# Altium PCB PiezoControlBoard.PcbDoc (part 3 of 3)
Units mm, origin at the board's own origin, x right, y up, seen from the top; angles counter-clockwise.
Board outline 90 x 115 mm, 4 copper layers (SIGNAL TOP, GND, PWR, SIGNAL BOT), stack 1.59 mm thick; 145 components, 86 nets, 512 pads, 287 vias.
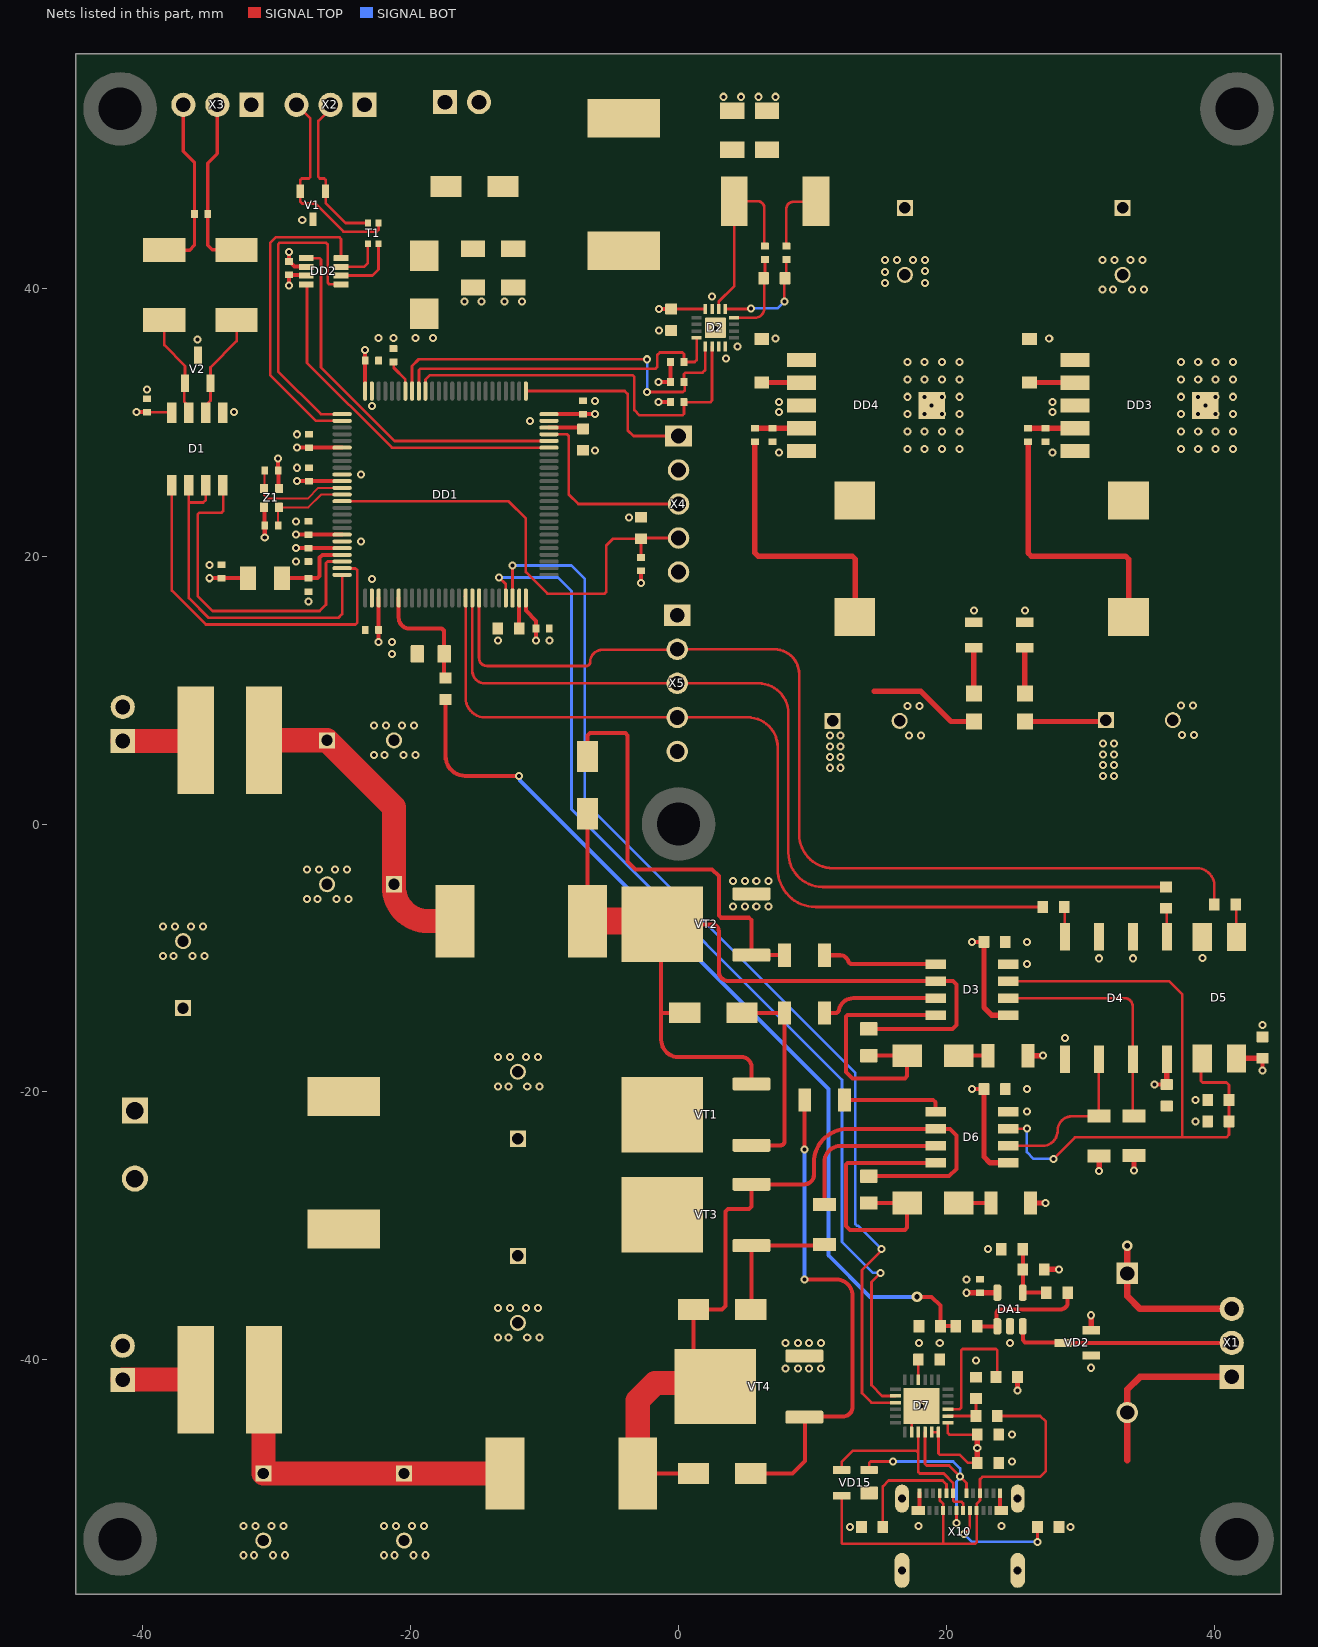
[diagram p4: the nets of this part, all layers, seen from the top]

## Part data (continued)
V1: "TVS DIODE 24VWM 40VC SOT23-3L / ESD Suppressor Diode TVS Bi-Dir 24V Automotive 3-Pin SOT-23 T/R", Manufacturer=STMicroelectronics, Supplier Part Number 1=1027027, Category="TVS Diodes", ComponentLink1Description=https://datasheet.ciiva.com/26935/getdatasheetpartid-779627-26935935.pdf?src-supplier=Verical, ComponentLink1URL=https://datasheet.ciiva.com/26935/getdatasheetpartid-779627-26935935.pdf?src-supplier=Verical, ComponentLink2Description=https://datasheet.ciiva.com/12070/dm00037599-100424-12070821.pdf?src-supplier=Mouser, ComponentLink2URL=https://datasheet.ciiva.com/12070/dm00037599-100424-12070821.pdf?src-supplier=Mouser, ComponentLink3Description=https://datasheet.ciiva.com/23803/dm00037599-23803632.pdf?src-supplier=Newark, ComponentLink3URL=https://datasheet.ciiva.com/23803/dm00037599-23803632.pdf?src-supplier=Newark, ComponentLink4Description=https://datasheet.ciiva.com/22685/1786030-22685811.pdf?src-supplier=Element14, ComponentLink4URL=https://datasheet.ciiva.com/22685/1786030-22685811.pdf?src-supplier=Element14, ComponentLink5Description=https://datasheet.ciiva.com/6574/dm00037599-6574397.pdf?src-supplier=Digikey, ComponentLink5URL=https://datasheet.ciiva.com/6574/dm00037599-6574397.pdf?src-supplier=Digikey, ComponentLink6Description=https://datasheet.ciiva.com/6574/dm00037599-6574398.pdf?src-supplier=Digikey, ComponentLink6URL=https://datasheet.ciiva.com/6574/dm00037599-6574398.pdf?src-supplier=Digikey, ComponentLink7Description=https://datasheet.ciiva.com/41443/001183991-da-01-en-tvs-diode-24-esdcan24-2bly-sot-23-3l-stm-41443402.pdf?src-supplier=Conrad, ComponentLink7URL=https://datasheet.ciiva.com/41443/001183991-da-01-en-tvs-diode-24-esdcan24-2bly-sot-23-3l-stm-41443402.pdf?src-supplier=Conrad, Manufacturer Part Number=ESDCAN24-2BLY, Pricing 1="3000=0,102, 6000=0,0993, 9000=0,064, 12000=0,0968, 15000=0,096, 30000=0,0613, 45000=0,0912, 60000=0,059 (USD)", RoHS=Yes, Stock 1=135000, Supplier 1=https://www.chipdip.ru/product/esdcan24-2bly-umw?from=suggest_product
V2: "SM Series 12 V 400 W Asymmetrical TVS Diode for Extended Common-Mode - SOT-23", Breakdown Voltage=13.3V, Case/Package=SOT-23, Clamping Voltage=26V, Clamping Voltage-Max=12V, Leakage Current=1uA, Manufacturer=Semtech, Max Operating Temperature=125°C, Max Power Dissipation=400W, Max Reverse Leakage Current=20uA, Min Breakdown Voltage=7.5V, Min Operating Temperature=-55°C, Peak Pulse Current=17A, Power Line Protection=No, Supplier Part Number=6910811P, Test Current=1mA, Category="TVS Diodes", ComponentLink1Description=https://datasheet.ciiva.com/16393/sm712-16393584.pdf?src-supplier=Future+Electronics, ComponentLink1URL=https://datasheet.ciiva.com/16393/sm712-16393584.pdf?src-supplier=Future+Electronics, ComponentLink2Description=https://datasheet.ciiva.com/18065/getdatasheetpartid-110620-18065348.pdf?src-supplier=Verical, ComponentLink2URL=https://datasheet.ciiva.com/18065/getdatasheetpartid-110620-18065348.pdf?src-supplier=Verical, ComponentLink3Description=https://datasheet.ciiva.com/5748/579001-5748455.pdf?src-supplier=Farnell, ComponentLink3URL=https://datasheet.ciiva.com/5748/579001-5748455.pdf?src-supplier=Farnell, ComponentLink4Description=https://datasheet.ciiva.com/8029/579001-8029931.pdf?src-supplier=Element14, ComponentLink4URL=https://datasheet.ciiva.com/8029/579001-8029931.pdf?src-supplier=Element14, ComponentLink5Description=https://datasheet.ciiva.com/339/sm712-339089.pdf?src-supplier=Digikey, ComponentLink5URL=https://datasheet.ciiva.com/339/sm712-339089.pdf?src-supplier=Digikey, ComponentLink6Description=https://datasheet.ciiva.com/339/sm712-339090.pdf?src-supplier=Digikey, ComponentLink6URL=https://datasheet.ciiva.com/339/sm712-339090.pdf?src-supplier=Digikey, ComponentLink7Description=https://datasheet.ciiva.com/339/sm712-339091.pdf?src-supplier=Digikey, ComponentLink7URL=https://datasheet.ciiva.com/339/sm712-339091.pdf?src-supplier=Digikey, Depth=1.3mm, Diode Type=ZENER, Direction=Bidirectional, ESD Protection=Yes, Height=0.95mm, Lead Free="Lead Free", Length=2.9mm, Manufacturer Part Number=SM712.TCT, Max Breakdown Voltage=13.3V, Mounting Technology="Surface Mount", Number of Bidirectional Channels=2, Number of Channels=2NUMBER, Number of Elements=2, Packaging="Tape and Reel", Peak Pulse Power=400W, Pins=3, Polarity=Bidirectional, Power Dissipation=400W, Pricing="25=0,92, 50=0,82, 125=0,726, 250=0,712 (GBP)", Radiation Hardening=No, Reach SVHC Compliant=No, Reverse Breakdown Voltage=13.3V, Reverse Standoff Voltage=12V, RoHS=Yes, RoHS Compliant=Yes, Series=-, Stock=2025, Supplier=Rs, Supplier 1=https://www.chipdip.ru/product/sm712.tct, Voltage Rating (DC)=12V, Width=1.3mm, Working Voltage=12V
VD1: "Стабилитрон кремниевый, 12В", Supplier 1=https://www.chipdip.ru/product/d814d-metall-stabilitron-kremnievyy-12v-sztp-9000500630?from=rec_product_auto
VD2: "Диод импульсный, 2 х 0.215/0.3А, 85В, последовательное включение", Supplier 1=https://www.chipdip.ru/product/bav199-diod-impulsnyy-2-h-0.215-0.3a-85v-diotec-9000854588
VD3: "Rectifier Diode, Schottky, 1 Phase, 1 Element, 3A, 40V V(RRM), Silicon, DO-214AC", Manufacturer="Vishay Semiconductors", Category="Rectifier Diodes", ComponentLink1Description=https://datasheet.ciiva.com/22685/1719678-22685665.pdf?src-supplier=Element14, ComponentLink1URL=https://datasheet.ciiva.com/22685/1719678-22685665.pdf?src-supplier=Element14, ComponentLink2Description=https://datasheet.ciiva.com/4245/b330la-4245394.pdf?src-supplier=Arrow+Electronics, ComponentLink2URL=https://datasheet.ciiva.com/4245/b330la-4245394.pdf?src-supplier=Arrow+Electronics, ComponentLink3Description=https://datasheet.ciiva.com/911/b330la-911044.pdf?src-supplier=Digikey, ComponentLink3URL=https://datasheet.ciiva.com/911/b330la-911044.pdf?src-supplier=Digikey, ComponentLink4Description=https://datasheet.ciiva.com/911/b330la-911045.pdf?src-supplier=Digikey, ComponentLink4URL=https://datasheet.ciiva.com/911/b330la-911045.pdf?src-supplier=Digikey, ComponentLink5Description=https://datasheet.ciiva.com/911/b330la-911046.pdf?src-supplier=Digikey, ComponentLink5URL=https://datasheet.ciiva.com/911/b330la-911046.pdf?src-supplier=Digikey, Manufacturer Part Number=B340A-E3/61T, Pricing="3600=0,11, 7200=0,10732, 10800=0,10602, 18000=0,10476, 36000=0,10353 (USD)", RoHS=Yes, Stock=19800, Supplier=Avnet, Supplier 1=https://www.chipdip.ru/product/b340a-e3-61t-2?from=suggest_product, Supplier Part Number=B340A-E3/61T
VD4 VD7: library part "LED 0805", "LED SMD 0805"
  VD4: Part Number=KP-2012SYC, Supplier 1=https://www.chipdip.ru/product0/8001782012
  VD7: Part Number=KP-2012HD, Supplier 1=https://www.chipdip.ru/product0/8001788575
VD5: "SMBJ36A, Защитный диод 600Вт 36В [SMB / DO-214AA]", Supplier 1=https://www.chipdip.ru/product/smbj36a-zaschitnyy-diod-600vt-36v-smb-do-214aa-umw-9001169227
VD6 VD8: "Диод Шоттки 40В 1А", Supplier 1=https://www.chipdip.ru/product/1n5819w
VD9 VD12: "Rectifier Diode, 1 Phase, 1 Element, 2A, 600V V(RRM), Silicon", Average Rectified Current=2A, Case/Package=SMA, Forward Voltage=1.25V, Manufacturer=STMicroelectronics, Max Forward Surge Current (Ifsm)=30A, Max Junction Temperature (Tj)=175°C, Max Repetitive Reverse Voltage (Vrrm)=600V, Min Operating Temperature=-40°C, Peak Reverse Current=2µA, Supplier Part Number=1685754, Category="Rectifier Diodes", China RoHS=Non-Compliant, ComponentLink1Description=https://datasheet.octopart.com:443/STTH2R06A-STMicroelectronics-datasheet-8449154.pdf?src-supplier=element14+APAC, ComponentLink1URL=https://datasheet.octopart.com:443/STTH2R06A-STMicroelectronics-datasheet-8449154.pdf?src-supplier=element14+APAC, ComponentLink2Description=https://datasheet.octopart.com:443/STTH2R06A-STMicroelectronics-datasheet-12526389.pdf?src-supplier=Newark, ComponentLink2URL=https://datasheet.octopart.com:443/STTH2R06A-STMicroelectronics-datasheet-12526389.pdf?src-supplier=Newark, ComponentLink3Description=https://datasheet.octopart.com:443/STTH2R06A-STMicroelectronics-datasheet-14054141.pdf?src-supplier=iiiC, ComponentLink3URL=https://datasheet.octopart.com:443/STTH2R06A-STMicroelectronics-datasheet-14054141.pdf?src-supplier=iiiC, ComponentLink4Description=https://datasheet.octopart.com:443/STTH2R06A-STMicroelectronics-datasheet-8633837.pdf?src-supplier=Jameco, ComponentLink4URL=https://datasheet.octopart.com:443/STTH2R06A-STMicroelectronics-datasheet-8633837.pdf?src-supplier=Jameco, ComponentLink5Description=https://datasheet.octopart.com:443/STTH2R06A-STMicroelectronics-datasheet-30637.pdf?src-supplier=DigiKey, ComponentLink5URL=https://datasheet.octopart.com:443/STTH2R06A-STMicroelectronics-datasheet-30637.pdf?src-supplier=DigiKey, Contact Plating=Tin, Country of Origin="Mainland China", Current Rating=2A, Element Configuration=Single, Export Control Classification Number (ECCN) Code=EAR99, Forward Current=2A, Harmonized Tariff Schedule (HTS) Code=8541.10.00.80, Height=2.03mm, Introduction Date=2004-09-07, Lead Free="Lead Free", Length=4.6mm, Lifecycle Status=Production, Manufacturer Part Number=STTH2R06A, Max Operating Temperature=175°C, Max Output current=2A, Max Reverse Voltage (DC)=600V, Max Surge Current=30A, Mounting Technology="Surface Mount", Number of Elements=1, Number of Terminals=2, Output Current=2A, Packaging="Tape and Reel", Peak Non-Repetitive Surge Current=30A, Pins=2, Polarity=Standard, Pricing="5000=0,1 (GBP)", Radiation Hardening=No, REACH SVHC=No, Recovery Time=50ns, Reverse Recovery Time=50ns, Reverse Standoff Voltage=600V, Reverse Voltage=600V, RoHS=Compliant, Schedule B="8541100080, 8541100080|8541100080|8541100080|8541100080|8541100080", Stock=4220, Supplier=RS, Supplier 1=https://www.chipdip.ru/product/stth2r02a-st-microelectronics-8000276925, Voltage Rating (DC)=600V, Width=2.95mm
VD10 VD11 VD13 VD14: "Диод защитный от перенапряжения - TVS (супрессор) 12В включение 19.9В ограничение SMA", Breakdown Voltage="14 V", Maximum Clamping Voltage (V)="25.3 V", Maximum Peak Pulse Current (A)="91 A", Minimum Breakdown Voltage (V)="13.3 V", Supplier 1=https://www.chipdip.ru/product/smaj12ca-tr-st-microelectronics-8124212433
VD15: "SP050xBA Series 8.5 V 30 pF Triple Uni-Directional TVS Avalanche Diode-SOT143-4", Breakdown Voltage=5.5V, Case/Package=SOT-143, Clamping Voltage=7.8V, Clamping Voltage-Max=8V, Leakage Current=100nA, Manufacturer=Littelfuse, Max Operating Temperature=85°C, Max Power Dissipation=225mW, Min Operating Temperature=-40°C, Power Line Protection=No, Voltage Rating (DC)=5V, Category="TVS Diodes", ComponentLink1Description=https://datasheet.ciiva.com/15143/getdatasheetpartid-116020-15143550.pdf?src-supplier=Verical, ComponentLink1URL=https://datasheet.ciiva.com/15143/getdatasheetpartid-116020-15143550.pdf?src-supplier=Verical, ComponentLink2Description=https://datasheet.ciiva.com/7650/526672-7650894.pdf?src-supplier=Element14, ComponentLink2URL=https://datasheet.ciiva.com/7650/526672-7650894.pdf?src-supplier=Element14, ComponentLink3Description=https://datasheet.ciiva.com/8062/littefuse-spa-sp050x-8062422.pdf?src-supplier=Element14, ComponentLink3URL=https://datasheet.ciiva.com/8062/littefuse-spa-sp050x-8062422.pdf?src-supplier=Element14, ComponentLink4Description=https://datasheet.ciiva.com/22697/1911798-22697942.pdf?src-supplier=Element14, ComponentLink4URL=https://datasheet.ciiva.com/22697/1911798-22697942.pdf?src-supplier=Element14, ComponentLink5Description=https://datasheet.ciiva.com/4509/sp05x-leadfree-4509162.pdf?src-supplier=Mouser, ComponentLink5URL=https://datasheet.ciiva.com/4509/sp05x-leadfree-4509162.pdf?src-supplier=Mouser, ComponentLink6Description=https://datasheet.ciiva.com/332/sp05xxba-332551.pdf?src-supplier=Digikey, ComponentLink6URL=https://datasheet.ciiva.com/332/sp05xxba-332551.pdf?src-supplier=Digikey, ComponentLink7Description=https://datasheet.ciiva.com/332/sp05xxba-332552.pdf?src-supplier=Digikey, ComponentLink7URL=https://datasheet.ciiva.com/332/sp05xxba-332552.pdf?src-supplier=Digikey, ComponentLink8Description=https://datasheet.ciiva.com/332/sp05xxba-332550.pdf?src-supplier=Digikey, ComponentLink8URL=https://datasheet.ciiva.com/332/sp05xxba-332550.pdf?src-supplier=Digikey, ComponentLink9Description=https://datasheet.ciiva.com/16449/sp05xxba-16449463.pdf?src-supplier=Future+Electronics, ComponentLink9URL=https://datasheet.ciiva.com/16449/sp05xxba-16449463.pdf?src-supplier=Future+Electronics, Depth=1.4mm, Diode Type=Avalanche, Direction=Unidirectional, ESD Protection=Yes, Height=1.05mm, Lead Free="Lead Free", Length=3.04mm, Manufacturer Part Number=SP0503BAHTG, Max Reverse Leakage Current=100nA, Mounting Technology="Surface Mount", Number of Channels=3, Number of Elements=3, Number of Unidirectional Channels=3, Operating Supply Voltage=5.5V, Packaging="Tape and Reel", Peak Pulse Power=225mW, Pins=4, Polarity=Bidirectional,Unidirectional, Power Dissipation=225mW, Pricing="3000=0,2519, 9000=0,2382 (USD)", Radiation Hardening=No, Reach SVHC Compliant=No, Reverse Standoff Voltage=5.5V, RoHS=Yes, RoHS Compliant=Yes, Series="SP05, SPA®", Stock=87000, Supplier="Arrow Electronics", Supplier 1=https://www.chipdip.ru/product/sp0503bahtg, Supplier Part Number=SP0503BAHTG, Termination=SMD/SMT, Width=1.4mm, Working Voltage=5.5V
VT1 VT2 VT3 VT4: "Fairchild Semiconductor’s new QFET® planar MOSFETs use advanced, proprietary technology to offer best-in-class operating performance for a wide range of applications, including power supplies, PFC (Power Factor Correction), DC-DC Converters, Plasma Display Panels (PDP), lighting ballasts, and motion control.", Continuous Drain Current Id=9A, Drain Source On State Resistance=0.28ohm, Drain Source Voltage Vds=200V, Gate Source Threshold Voltage Max=2V, Power Dissipation=2.5W, Rds(on) Test Voltage=10V, Channel Type="N Channel", Supplier 1=https://www.chipdip.ru/product/fqd12n20ltm-tranzistor-n-mosfet-200v-9a-on-semiconductor-9050001558
X1 X2 X3: "Клеммник 3 конт. шаг 2.54 мм, вертик. на плату, H = 8.5 мм, провод под винт/микролифт (пров. 26-18AWG/ до 1.0 кв.мм), до 150В/6А, зеленый изол.", Curciut 1=Общий, Supplier 1=https://www.chipdip.ru/product/308-031-14-dg308-2.54-03p-klemmnik-vintovoy-xinya-xinlaiya-10706
  X1: Curciut 2="ПЧД Вход", Curciut 3=+12В
  X2: Curciut 2=CAN_HIGH, Curciut 3=CAN_LOW
  X3: Curciut 2=A, Curciut 3=B
X4 X5: "Штыри однорядные 1x5 конт. шаг 2.54 мм", Supplier 1=https://www.chipdip.ru/product/pls-5
  X4: Curciut 1=SWCLK, Curciut 2=Общий, Curciut 3=SWDIO, Curciut 4=RST, Curciut 5=+3.3В
  X5: Curciut 1=+3.3В, Curciut 2=инв.Блок, Curciut 3="ШИМ 30кГц", Curciut 4="инв.ШИМ 30кГц", Curciut 5=Общий
X6 X8 X9: "Клеммник 2 конт. шаг 2.54 мм, вертик. на плату, H = 8.5 мм, провод под винт/микролифт (пров. 26-18AWG/ до 1.0 кв.мм), до 150В/6А, зеленый изол.", Curciut 2=Общий, Supplier 1=https://www.chipdip.ru/product/dg308-2.54-02p-14-00ah-308-021-14-klemmnik-vintovoy-degson-63066?from=visited_product
  X6: Curciut 1=24В...34В
  X8: Curciut 1="Выход/ Пъезо 1"
  X9: Curciut 1="Выход/ Пъезо 2"
X7: "Terminal block DG127-5.08-02P-14-00AH, 2-ways, vertical, 5.08mm, screw (-), green, max wire 1.5mm2, RoHS", Curciut 1="150В, 1А", Curciut 2="Общий, 150В", Supplier 1=https://www.chipdip.ru/product0/8001774499
X10: "USB Connector, 24 Contact(s), Female, Right Angle, Surface Mount Terminal, Receptacle", Case/Package=0101, Flammability Rating="UL94 V-0", Insulation Color=Black, Manufacturer=Molex, Max Operating Temperature=85°C, Min Operating Temperature=-30°C, Supplier Part Number=538-105450-0101, Voltage Rating=30V, A1=GND, A2=TX1+, A3=TX1-, A4=VBUS, A5=CC1, A6=D+, A7=D-, A8=SBU1, A9=VBUS, A10=RX2-, A11=RX2+, A12=GND, B1=GND, B2=TX2+, B3=TX2-, B4=VBUS, B5=CC2, B6=D+, B7=D-, B8=SBU2, B9=VBUS, B10=RX1-, B11=RX1+, B12=GND, Category="USB Connectors", ComponentLink1Description=http://www.farnell.com/datasheets/2801634.pdf?src-supplier=Farnell, ComponentLink1URL=http://www.farnell.com/datasheets/2801634.pdf?src-supplier=Farnell, ComponentLink2Description=http://www.farnell.com/datasheets/2801634.pdf?src-supplier=Newark, ComponentLink2URL=http://www.farnell.com/datasheets/2801634.pdf?src-supplier=Newark, ComponentLink3Description=http://www.literature.molex.com/SQLImages/kelmscott/Molex/PDF_Images/987651-4081.PDF?src-supplier=Avnet, ComponentLink3URL=http://www.literature.molex.com/SQLImages/kelmscott/Molex/PDF_Images/987651-4081.PDF?src-supplier=Avnet, ComponentLink4Description=http://www.farnell.com/datasheets/2015275.pdf?src-supplier=Element14, ComponentLink4URL=http://www.farnell.com/datasheets/2015275.pdf?src-supplier=Element14, ComponentLink5Description=http://www.farnell.com/datasheets/2801634.pdf?src-supplier=Element14, ComponentLink5URL=http://www.farnell.com/datasheets/2801634.pdf?src-supplier=Element14, ComponentLink6Description=http://www.farnell.com/datasheets/2672741.pdf?src-supplier=Newark, ComponentLink6URL=http://www.farnell.com/datasheets/2672741.pdf?src-supplier=Newark, Connector Type=USB, Contact Material="Copper Alloy", Contact Plating=Gold, Features=Shielded, Gender=Receptacle, Height=3.44mm, Housing Material=Thermoplastic, Length=8.94mm, Manufacturer Part Number=105450-0101, Mating Cycles=10000, Mounting Technology="Surface Mount,Horizontal,Through Hole", Number of Circuits=24NUMBER, Number of Contacts=24, Number of Ports=1, Number of Rows=2NUMBER, Orientation="Right Angle", Packaging="Tape and Reel", Pins=24, Pitch=0.5mm, Plating=157ConductorMaterial, Pricing="1=2,38, 10=2,03, 50=2,03, 100=1,79, 1000=1,67, 10000=1,41 (USD)", Reach SVHC Compliant=Unknown, RoHS=Yes, RoHS Compliant=Yes, Series=-, Shielding=Shielded, Stock=17652, Supplier=Mouser, Supplier 1=https://www.chipdip.ru/product/105450-0101-molex, Termination=Solder, USB Standard="USB 3.1"
Z1: "Crystal 25MHz ±20ppm (Tol) ±20ppm (Stability) 10pF FUND 100Ohm 4-Pin Ultra Mini-CSMD T/R", Manufacturer=Abracon, Category="Crystals and Oscillators", ComponentLink1Description=https://datasheet.octopart.com/ABM11-25.000MHZ-D2X-T-Abracon-datasheet-12518431.pdf?src-supplier=Sager+Electronics, ComponentLink1URL=https://datasheet.octopart.com/ABM11-25.000MHZ-D2X-T-Abracon-datasheet-12518431.pdf?src-supplier=Sager+Electronics, Manufacturer Part Number=ABM11-25.000MHZ-D2X-T, Pricing="259=0,3855, 500=0,3667, 1000=0,363, 2000=0,3516, 5000=0,3277 (USD)", RoHS=No, Stock=4570, Supplier 1=https://www.chipdip.ru/product0/8009921874, Supplier Part Number=ABM11-25.000MHZ-D2X-T

## Via types
v1: diameter 0.6, hole 0.3, SIGNAL TOP to SIGNAL BOT, tented both sides, 285 vias
v2: diameter 0.8, hole 0.4, SIGNAL TOP to SIGNAL BOT, tented both sides, 2 vias

## Nets (pads, with @x,y where several pads share a name; then routed paths per layer and width w, separated by ;. In a path a pad name is that pad's centre, name@x,y a point inside that pad or via, vN(x,y) a via of type N, cw(c..) or ccw(c..) an arc to the next point about the centre after c; other vN are vias at no path point)
+3.3V: C1.1 C3.1 C10.1 C11.1 C12.1 C13.1 C14.1 C15.1 C16.1 C17.1 C18.1 C27.1 C29.P C44.2 C45.2 D1.8 D2.9 D7.5 D7.6 D7.7 DD1.6 DD1.11 DD1.19 DD1.21 DD1.28 DD1.50 DD1.75 DD1.100 DD2.3 L1.1 L4.2 R5.2 R16.2 R17.2 R18.2 R19.2 R36.1 VD7.1 X4.5 X5.1 | length 82.3
  SIGNAL TOP w0.2: -39.4,30.75 D1.8@-37.84,30.75 ; D7.5@18.9,-45.41 D7.6@19.4,-45.41 19.4,-46.983 19.517,-47.1 21,-47.1 21.6,-47.7 C44.2@22.3,-47.7 ; D7.7@20.105,-44.705 20.105,-45.483 20.222,-45.6 C45.2@22.3,-45.6
  SIGNAL TOP w0.25: C27.1@-0.55,38.45 D2.9@2,38.45
  SIGNAL TOP w0.3: v1(-40.487,30.75) C3.1@-39.712,30.75 ; v1(-35.025,18.35) C18.1@-34.125,18.35 L1.1@-32.15,18.35 ; C1.1@-29.2,40.975 C1.1@-29.175,40.975 ; C1.1@-29.2,41 C1.1@-29.175,40.975 ; v1(-29.1,40.2) C1.1@-29.1,40.975 ; C1.1@-29.1,41 C1.1@-29.1,40.975 ; v1(-28.55,20.6) C14.1@-27.65,20.6 -26.6,20.6 DD1.21@-25.125,20.6 ; v1(-28.55,21.6) C15.1@-27.65,21.6 -26.6,21.6 DD1.19@-25.125,21.6 ; v1(-28.5,25.6) C16.1@-27.6,25.6 DD1.11@-25.125,25.6 ; v1(-28.5,28.1) DD1.6@-25.125,28.1 ; DD2.3@-27.8,40.95 -27.825,40.975 C1.1@-29.1,40.975 ; DD1.100@-23.4,32.325 -23.4,32.9 C10.1@-23.4,34.6 ; C10.1@-23.4,34.612 v1(-23.4,35.387) ; v1(-22.4,13.6) C13.1@-22.4,14.5 ; C13.1@-22.4,14.6 DD1.28@-22.4,16.875 ; DD1.50@-11.4,16.875 -11.4,15.925 -10.65,15.175 C12.1@-10.65,14.6 v1(-10.65,13.7) ; DD1.75@-9.675,30.6 C11.1@-7.125,30.6 v1(-6.225,30.6) ; v1(-2.8,18) R5.2@-2.8,18.9 ; v1(-1.5,31.5) R17.2@-0.6,31.5 ; v1(-1.5,33) R18.2@-0.6,33 R19.2@-0.6,34.5 ; v1(-1.45,38.45) C27.1@-0.55,38.45 ; C29.P@11.25,7.45 C29.P@11.5,7.7 ; C1.1@-29.175,40.975 C1.1@-29.1,40.975
  SIGNAL TOP w0.4: R16.2@5.7,28.55 5.7,20.234 5.934,20 12.966,20 13.2,19.766 L4.2@13.2,15.45 ; 14.6,9.9 18.1,9.9 20.35,7.65 VD7.1@22.05,7.65 ; C44.2@22.3,-47.7 v1(22.3,-46.6) C45.2@22.3,-45.6 ; v1(25.3,-42.3) R36.1@25.3,-41.3
  other v1: 11.3,4.2 12.1,4.2 11.3,5 12.1,5 11.3,5.8 12.1,5.8 11.3,6.6 12.1,6.6
+12V: C2.1 C21.P C33.2 C35.2 C38.2 C41.2 D3.1 D4.8 D5.4 D6.1 DA1.5 L3.2 R2.2 R11.2 R22.1 R24.2 R25.2 R31.1 VD1.C VD2.2 VD4.1 X1.3 | length 69
  SIGNAL TOP w0.3: v1(21.9,-19.8) C41.2@22.8,-19.8 ; v1(21.9,-8.8) C35.2@22.8,-8.8 ; v1(35.55,-19.45) C33.2@36.45,-19.45 ; v1(43.6,-18.4) C38.2@43.6,-17.5
  SIGNAL TOP w0.4: v1(21.5,-35) C2.1@22.5,-35 22.55,-35 22.555,-34.995 DA1.5@23.8,-34.995 ; C41.2@22.8,-19.8 22.8,-24.847 23.258,-25.305 D6.1@24.612,-25.305 ; C35.2@22.8,-8.8 22.8,-13.7 23.37,-14.27 D3.1@24.724,-14.27 ; VD4.1@25.85,7.65 31.8,7.65 C21.P@31.9,7.75 ; R22.1@26.08,-17.3 v1(27.2,-17.3) ; R11.2@26.1,28.55 26.1,20.234 26.334,20 33.366,20 33.6,19.766 L3.2@33.6,15.45 ; R31.1@26.28,-28.3 v1(27.4,-28.3) ; R2.2@27.3,-33.25 v1(28.42,-33.25) ; VD2.2@30.8,-37.8 v1(30.8,-36.68) ; v1(31.4,-25.9) R25.2@31.4,-24.78 ; v1(34,-25.88) R24.2@34,-24.76 ; D4.8@36.46,-17.575 36.46,-19.41 ccw(c36.5,-19.41) 36.5,-19.45 ccw(c36.525,-19.45) C33.2@36.525,-19.475 ; D5.4@41.65,-17.5 C38.2@43.665,-17.5
  SIGNAL TOP w0.5: v2(33.5,-31.5) VD1.C@33.5,-33.553 33.5,-35.25 34.45,-36.2 X1.3@41.3,-36.2
  other v1: 31.7,3.6 32.5,3.6 31.7,4.4 32.5,4.4 31.7,5.2 32.5,5.2 31.7,6 32.5,6
+150V: C30.P L5.1 X7.1
+150V_FILT: C31.P C32.P L5.2 VT1.D VT3.D
\R\E\/DE: D1.2 D1.3 DD1.25 | length 25.9
  SIGNAL TOP w0.2: D1.2@-36.57,25.25 -36.57,24 ; D1.3@-35.3,25.25 -35.3,24.2 -35.5,24 -36.57,24 ; DD1.25@-25.125,18.6 -25.125,15.675 -25.4,15.4 -35.1,15.4 -36.57,16.87 -36.57,24
A: F2.1 R4.1 X3.2 | length 13.1
  SIGNAL TOP w0.25: X3.2@-34.44,53.7 -34.44,50.06 -35.15,49.35 R4.1@-35.15,45.55 -35.15,43.2 -34.815,42.865 F2.1@-33,42.865
A\M\P\_\E\N\: DD1.43 R29.1 X5.2 | length 77
  SIGNAL TOP w0.2: DD1.43@-14.9,16.875 -14.9,12.4 ccw(c-14.3,12.4) -14.3,11.8 -6.9,11.8 ccw(c-6.9,12.1) -6.6,12.1 cw(c-5.7,12.1) -5.7,13 -0.14,13 ccw(c-0.14,13.04) X5.2@-0.1,13.04 7.16,13.04 cw(c7.16,11.2) 9,11.2 9,-0.76 ccw(c11.54,-0.76) 11.54,-3.3 38.7,-3.3 cw(c38.7,-4.6) 40,-4.6 R29.1@40,-6
ADC_SENSOR: R6.1 R7.1 R8.2 | length 68.5
  SIGNAL TOP w0.3: R7.1@-17.4,9.3 -17.4,5.062 ccw(c-15.938,5.062) -15.938,3.6 v1(-11.9,3.6) ; v2(17.8,-35.3) 18.9,-35.3 19.55,-35.95 R8.2@19.55,-37.5 R6.1@20.7,-37.5
  SIGNAL BOT w0.3: v1(-11.9,3.6) -11.843,3.543 -11.843,3.243 11.2,-19.8 11.2,-32.2 14.3,-35.3 v2(17.8,-35.3)
ADC_SENSOR_FILT: C6.2 DD1.31 R7.2 | length 9
  SIGNAL TOP w0.3: DD1.31@-20.9,16.875 -20.9,15.4 ccw(c-20.1,15.4) -20.1,14.6 -17.8,14.6 cw(c-17.8,14.3) -17.5,14.3 C6.2@-17.5,12.7 -17.5,11 ccw(c-17.4,11) R7.2@-17.4,10.9
B: F1.1 R4.2 X3.3 | length 13.2
  SIGNAL TOP w0.25: F1.1@-38.4,42.85 -36.5,42.85 -36.15,43.2 R4.2@-36.15,45.55 -36.15,49.4 -36.98,50.23 X3.3@-36.98,53.7
CAN_1_N: T1.1 V1.1 X2.3 | length 15.6
  SIGNAL TOP w0.2: X2.3@-28.533,53.7 -27.5,52.667 -27.5,48.317 -27.617,48.2 -28.133,48.2 -28.25,48.083 -28.25,46.472 -28.104,46.325 -27.125,46.325 -25.025,44.225 -22.546,44.225 -22.4,44.371 T1.1@-22.4,44.875
CAN_1_P: T1.4 V1.2 X2.2 | length 11.9
  SIGNAL TOP w0.2: V1.2@-26.35,47.242 -26.35,46.365 -24.86,44.875 T1.4@-23.2,44.875 ; V1.2@-26.35,47.245 -26.35,48.083 -26.467,48.2 -26.783,48.2 -26.9,48.317 -26.9,52.5 -25.993,53.407 X2.2@-25.993,53.7
CAN_1F_N: DD2.6 T1.2 | length 4.9
  SIGNAL TOP w0.2: DD2.6@-25.2,40.95 -22.85,40.95 -22.4,41.4 T1.2@-22.4,43.325
CAN_1F_P: DD2.7 T1.3 | length 3.5
  SIGNAL TOP w0.2: DD2.7@-25.2,41.6 -23.5,41.6 -23.2,41.9 T1.3@-23.2,43.325
CAN_RXD: DD1.70 DD2.4 | length 26.6
  SIGNAL TOP w0.2: DD2.4@-27.8,40.3 -27.8,40.225 -27.75,40.175 -27.75,34.436 -21.414,28.1 DD1.70@-9.675,28.1
CAN_RXONLY: DD1.2 DD2.8 | length 23
  SIGNAL TOP w0.2: DD1.2@-25.7,30.1 -27.075,30.1 -30.5,33.525 -30.5,43.383 -30.083,43.8 -25.317,43.8 -25.2,43.683 DD2.8@-25.2,42.25
CAN_SHTDN: DD1.1 DD2.5 | length 23.3
  SIGNAL TOP w0.2: DD2.5@-25.2,40.3 -26.083,40.3 -26.2,40.417 -26.2,43.283 -26.317,43.4 -29.783,43.4 -29.9,43.283 -29.9,33.8 -26.7,30.6 DD1.1@-25.125,30.6
CAN_TXD: DD1.71 DD2.1 | length 28.5
  SIGNAL TOP w0.2: DD2.1@-27.8,42.25 -26.817,42.25 -26.7,42.133 -26.7,34.1 -21.2,28.6 DD1.71@-9.675,28.6
CC1: R37.2 X10.A5 | length 8.8
  SIGNAL TOP w0.2: R37.2@15.25,-52.5 15.25,-49.45 15.68,-49.02 19.72,-49.02 20,-49.3 X10.A5@20,-49.96
CC2: R38.2 X10.B5 | length 8.8
  SIGNAL TOP w0.2: v1(21.3,-53) 21.75,-52.55 X10.B5@21.75,-51.26 ; v1(26.8,-53.6) R38.2@26.8,-52.5
  SIGNAL BOT w0.2: v1(21.3,-53) 21.9,-53.6 v1(26.8,-53.6)
CONSOLE_UART_RX: D7.21 DD1.48 | length 81.7
  SIGNAL TOP w0.2: DD1.48@-12.4,16.875 v1(-12.4,19.3) ; v1(15.16,-31.74) 15.16,-31.84 13.7,-33.3 13.7,-42.5 14.405,-43.205 D7.21@16.195,-43.205
  SIGNAL BOT w0.2: v1(-12.4,19.3) -8,19.3 -7,18.3 -7,1.6 13.2,-18.6 13.2,-29.883 13.317,-30 13.419,-30 v1(15.16,-31.74)
CONSOLE_UART_TX: D7.20 DD1.47 | length 79.2
  SIGNAL TOP w0.2: v1(-13.4,18.4) -12.9,17.9 DD1.47@-12.9,16.875 ; v1(15.09,-33.51) 14.4,-34.2 14.4,-41.9 15.205,-42.705 D7.20@16.195,-42.705
  SIGNAL BOT w0.2: v1(-13.4,18.4) -9,18.4 -8,17.4 -8,1.1 12.2,-19.1 12.2,-31.2 14.51,-33.51 v1(15.09,-33.51)
D+: D7.3 VD15.3 X10.A6 X10.B6 | length 15.3
  SIGNAL TOP w0.2: VD15.3@12.175,-48.24 12.175,-47.625 13,-46.8 17.754,-46.8 17.9,-46.946 ; D7.3@17.9,-45.41 17.9,-46.946 ; X10.B6@21.25,-51.26 21.25,-50.727 21.133,-50.61 20.617,-50.61 20.5,-50.493 X10.A6@20.5,-49.96 20.5,-49.2 19.8,-48.5 18.017,-48.5 17.9,-48.383 17.9,-46.946
D-: D7.4 VD15.2 X10.A7 X10.B7 | length 19.5
  SIGNAL TOP w0.2: VD15.2@14.225,-48.24 14.225,-47.717 14.342,-47.6 v1(16,-47.6) ; D7.4@18.4,-45.41 18.4,-47.783 18.517,-47.9 20.2,-47.9 21.5,-49.2 X10.A7@21.5,-49.96 ; v1(20.75,-52.2) X10.B7@20.75,-51.26
  SIGNAL BOT w0.2: v1(16,-47.6) 20.5,-47.6 21.02,-48.12 v1(21.02,-48.72) 21.02,-48.828 20.75,-49.098 v1(20.75,-52.2)
GND: C1.2 C2.2 C3.2 C4.1 C5.1 C6.1 C7.1 C8.1 C9.1 C10.2 C11.2 C12.2 C13.2 C14.2 C15.2 C16.2 C17.2 C18.2 C19.1 C20.N C21.N C22.1 C23.1 C24.1 C25.1 C27.2 C28.N C29.N C30.N C31.N C32.N C33.1 C35.1 C36.N C37.N C38.1 C39.1 C41.1 C42.N C43.N C44.1 C45.1 C46.1 D1.5 D2.1 D2.2 D2.10 D2.PAD D3.4 D4.2 D4.3 D4.5 D5.2 D6.4 D7.2 D7.25 DA1.2 DD1.10 DD1.20 DD1.27 DD1.74 DD1.99 DD2.2 DD3.3 DD3.5 DD3.PAD DD4.3 DD4.5 DD4.PAD R3.1 R8.1 R9.1 R12.1 R13.1 R20.1 R21.1 R30.1 R35.2 R37.1 R38.1 V1.3 V2.3 VD1.A VD2.1 VD5.A VD6.1 VD8.1 VD15.1 VT2.S VT4.S X1.1 X2.1 X3.1 X4.2 X5.5 X6.2 X7.2 X8.2 X9.2 X10.A1 X10.A12 X10.B1 X10.B12 X10.SHD Z1.2 Z1.4 | length 25.1
  SIGNAL TOP w0.2: D7.2@17.4,-45.41 D7.25@17.4,-44.205
  SIGNAL TOP w0.3: Z1.2@-30.95,23.65 -30.925,23.625 -30.925,22.325 C5.1@-30.9,22.3 v1(-30.9,21.4) ; v1(-29.9,27.3) C4.1@-29.9,26.4 -29.875,26.375 -29.875,25.075 Z1.4@-29.85,25.05 ; v1(-29.1,42.7) C1.2@-29.1,42 -29.05,42 -28.675,41.625 -27.825,41.625 DD2.2@-27.8,41.6 ; D7.25@17.4,-44.205 v1(18.15,-43.455) ; X10.B12@17.9,-51.26 18,-51.16 X10.A1@18,-49.96 ; X10.A12@24,-49.96 24,-51.16 X10.B1@24.1,-51.26
  SIGNAL TOP w0.5: 33.5,-47.5 VD1.A@33.5,-43.947 ; VD1.A@33.5,-43.927 33.5,-42.23 34.45,-41.28 X1.1@41.3,-41.28
  other v1: -32.5,-54.6 -31.7,-54.6 -30.3,-54.6 -29.4,-54.6 -22,-54.6 -21.2,-54.6 -19.8,-54.6 -18.9,-54.6 12.8,-52.5 29.25,-52.5 -32.5,-52.4 -31.6,-52.4 -30.4,-52.4 -29.5,-52.4 -22,-52.4 -21.1,-52.4 -19.9,-52.4 -19,-52.4 17.9,-52.4 24.1,-52.4 24.9,-47.6 24.9,-45.6 8,-40.67 8.9,-40.67 9.75,-40.67 10.65,-40.67 30.8,-40.6 22.2,-40.055 19.5,-38.755 8,-38.75 8.9,-38.75 9.75,-38.75 10.65,-38.75 17.95,-38.745 24.75,-38.75 -13.5,-38.35 -12.7,-38.35 -11.3,-38.35 -10.4,-38.35 -13.5,-36.15 -12.6,-36.15 -11.4,-36.15 -10.5,-36.15 21.5,-34 23.1,-31.75 38.6,-22.2 26,-21.45 38.6,-20.6 26,-19.8 -13.5,-19.6 -12.7,-19.6 -11.3,-19.6 -10.4,-19.6 -13.5,-17.4 -12.6,-17.4 -11.4,-17.4 -10.5,-17.4 28.84,-15.975 43.6,-15 26,-10.45 31.38,-10.025 33.92,-10.025 39.11,-10.02 -38.5,-9.85 -37.7,-9.85 -36.3,-9.85 -35.4,-9.85 26,-8.8 -38.5,-7.65 -37.6,-7.65 -36.4,-7.65 -35.5,-7.65 4.05,-6.17 4.95,-6.17 5.8,-6.17 6.7,-6.17 -27.75,-5.6 -26.95,-5.6 -25.55,-5.6 -24.65,-5.6 4.05,-4.25 4.95,-4.25 5.8,-4.25 6.7,-4.25 -27.75,-3.4 -26.85,-3.4 -25.65,-3.4 -24.75,-3.4 -22.75,5.15 -21.95,5.15 -20.55,5.15 -19.65,5.15 17.2,6.6 18.1,6.6 37.6,6.65 38.5,6.65 -22.75,7.35 -21.85,7.35 -20.65,7.35 -19.75,7.35 17.1,8.8 18,8.8 37.5,8.85 38.4,8.85 -21.4,12.7 -21.4,13.6 -13.5,13.7 -9.65,13.7 22.05,15.95 25.85,15.95 -27.65,16.6 -22.9,18.3 -35.025,19.35 -28.55,19.6 -23.7,21.1 -28.55,22.6 -3.7,22.9 -23.7,26.1 -28.5,26.6 7.5,27.75 27.925,27.75 -6.225,27.9 17.075,28 18.375,28 19.675,28 20.975,28 37.5,28 38.8,28 40.1,28 41.4,28 -28.5,29.1 17.075,29.3 18.375,29.3 19.675,29.3 20.975,29.3 37.5,29.3 38.8,29.3 40.1,29.3 41.4,29.3 -11.1,30.1 17.075,30.6 18.375,30.6 19.675,30.6 20.975,30.6 37.5,30.6 38.8,30.6 40.1,30.6 41.4,30.6 -33.2,30.75 7.5,30.75 27.925,30.75 -22.9,31.2 18.9,31.25 39.325,31.25 7.5,31.5 27.925,31.5 -6.225,31.6 17.075,31.9 18.375,31.9 19.675,31.9 20.975,31.9 37.5,31.9 38.8,31.9 40.1,31.9 41.4,31.9 -39.7,32.45 17.075,33.2 18.375,33.2 19.675,33.2 20.975,33.2 37.5,33.2 38.8,33.2 40.1,33.2 41.4,33.2 17.075,34.5 18.375,34.5 19.675,34.5 20.975,34.5 37.5,34.5 38.8,34.5 40.1,34.5 41.4,34.5 3.525,34.75 4.4,35.65 -35.904,36.168 7.25,36.25 27.675,36.25 -22.4,36.3 -21.3,36.3 -19.65,36.3 -18.35,36.3 -1.45,36.85 2.75,37.05 -16,39 -14.7,39 -13,39 -11.7,39 2.5,39.4 31.65,39.9 32.45,39.9 33.85,39.9 34.75,39.9 15.4,40.4 18.4,40.4 15.4,41.2 18.4,41.3 15.4,42.1 16.3,42.1 17.5,42.1 18.4,42.1 31.65,42.1 32.55,42.1 33.75,42.1 34.65,42.1 -28.1,45.1 3.35,54.3 4.65,54.3 5.95,54.3 7.25,54.3
MCU_RESET: C7.2 DD1.14 R5.1 X4.4 | length 35.5
  SIGNAL TOP w0.2: DD1.14@-25.125,24.1 -12.7,24.1 -11.4,22.8 -11.4,18.8 -9.8,17.2 -5.517,17.2 -5.4,17.317 -5.4,20.8 -4.9,21.3 C7.2@-2.8,21.3 ; R5.1@-2.8,19.9 C7.2@-2.8,21.3 ; X4.4@0,21.35 -2.75,21.35 C7.2@-2.8,21.3
NetC19_2: C19.2 DD1.22 L1.2 | length 6
  SIGNAL TOP w0.3: L1.2@-29.6,18.35 -26.976,18.35 -26.8,18.526 -26.8,19.9 -26.6,20.1 DD1.22@-25.125,20.1
NetC20_P: C20.P C28.P DD3.1 DD4.1 R10.2 R15.2 | length 5.4
  SIGNAL TOP w0.2: R15.2@8,43.1 ccw(c8,43.15) R15.2@8.05,43.15 8.05,45.95 cw(c8.55,45.95) 8.55,46.45 R10.2@10.3,46.45
NetC22_2: C22.2 C23.2 L2.1 VD3.C VD5.C
NetC26_1: C26.1 D2.13 R14.1 | length 6.4
  SIGNAL TOP w0.2: D2.13@4.15,37.8 5.7,37.8 ccw(c5.7,38.5) 6.4,38.5 6.4,40.7 ccw(c6.35,40.7) C26.1@6.35,40.75 ccw(c6.35,40.85) 6.45,40.85 R14.1@6.45,42.15
NetC26_2: C26.2 D2.12 R15.1 | length 7.9
  SIGNAL TOP w0.2: D2.12@3.5,38.45 5.35,38.45 ccw(c5.35,38.5) v1(5.4,38.5) ; v1(7.9,39) 7.9,40.7 cw(c7.95,40.7) C26.2@7.95,40.75 ccw(c7.95,40.85) 8.05,40.85 R15.1@8.05,42.15
  SIGNAL BOT w0.2: v1(5.4,38.5) 7.4,38.5 v1(7.9,39)
NetC34_1: C34.1 D3.6 L6.1 VD10.C VD11.A VT1.S VT2.D | length 68.3
  SIGNAL TOP w0.3: L6.1@-6.8,-7.25 VD11.A@-6.8,0.765 ; VT2.D@-1.46,-7.25 VT2.D@-1.21,-7.5 ; VD10.C@0.465,-14.1 -1.182,-14.1 ccw(c-1.182,-14.218) -1.3,-14.218 ; VT1.S@5.44,-19.41 5.44,-18.14 ccw(c4.7,-18.14) 4.7,-17.4 0,-17.4 cw(c0,-16.1) -1.3,-16.1 -1.3,-14.218 ; C34.1@14.2,-15.3 20.45,-15.3 20.75,-15 20.75,-12 20.48,-11.73 D3.6@19.188,-11.73 3.73,-11.73 cw(c3.73,-11) 3,-11 3,-8 ccw(c2.5,-8) 2.5,-7.5 VT2.D@-1.21,-7.5 ; -1.3,-14.218 -1.3,-7.59 cw(c-1.21,-7.59) VT2.D@-1.21,-7.5
  SIGNAL TOP w2: L6.1@-6.3,-7.25 VT2.D@-1.46,-7.25
NetC34_2: C34.2 D3.8 VD9.2 | length 20
  SIGNAL TOP w0.3: C34.2@14.2,-17.3 VD9.2@16.897,-17.3 ; VD9.2@17.07,-17.265 17.07,-18.824 16.894,-19 13,-19 12.5,-18.5 12.5,-14.387 12.617,-14.27 D3.8@19.188,-14.27
NetC36_P: C36.P C37.P L6.2 L7.1 | length 24.2
  SIGNAL TOP w1.8: L7.1@-30.95,6.25 C37.P@-26.25,6.25 -21.25,1.25 C36.P@-21.25,-4.5 -21.25,-4.71 ccw(c-18.71,-4.71) -18.71,-7.25 L6.2@-16.2,-7.25
NetC39_2: C39.2 D3.3 D5.3 D6.3 R30.2 | length 51
  SIGNAL TOP w0.2: D6.3@24.612,-22.765 26,-22.765 v1(26,-22.75) ; D3.3@24.612,-11.73 36.63,-11.73 37.6,-12.7 37.6,-23.4 ; v1(28,-25) 29.6,-23.4 37.6,-23.4 ; D5.3@39.11,-17.5 39,-17.61 39,-19.183 39.117,-19.3 40.9,-19.3 41.1,-19.5 R30.2@41.1,-20.6 C39.2@41.1,-22.2 41.1,-23.2 40.9,-23.4 37.6,-23.4
  SIGNAL BOT w0.2: v1(26,-22.75) 26,-24.5 26.5,-25 v1(28,-25)
NetC40_1: C40.1 D6.6 L8.1 VD13.C VD14.A VT3.S VT4.D | length 63.7
  SIGNAL TOP w0.3: L8.1@-3.05,-48.5 VD14.A@1.115,-48.5 ; VT4.D@2.74,-42 2.49,-41.75 1.115,-40.375 VD13.C@1.115,-36.25 3.25,-36.25 3.5,-36 3.5,-28.926 3.676,-28.75 5.264,-28.75 5.44,-28.574 VT3.S@5.44,-26.9 VT3.S@4.631,-26.9 ; VT3.S@5.5,-26.9 9.4,-26.9 ccw(c9.4,-26.2) 10.1,-26.2 10.1,-25.305 cw(c12.64,-25.305) 12.64,-22.765 D6.6@19.188,-22.765 20.265,-22.765 20.75,-23.25 20.75,-25.75 20.2,-26.3 C40.1@14.2,-26.3
  SIGNAL TOP w1.8: L8.1@-3.05,-48.5 -3.05,-43.05 -1.75,-41.75 VT4.D@2.49,-41.75
NetC40_2: C40.2 D6.8 VD12.2 | length 20.8
  SIGNAL TOP w0.3: C40.2@14.2,-28.3 VD12.2@17.07,-28.3 17.07,-30.13 16.9,-30.3 12.8,-30.3 12.5,-30 12.5,-25.422 12.617,-25.305 D6.8@19.188,-25.305
NetC42_P: C42.P C43.P L8.2 L9.1 | length 24.1
  SIGNAL TOP w1.8: C43.P@-31,-48.5 C42.P@-20.5,-48.5 -13.75,-48.5 -13.2,-49.05 L8.2@-13.2,-49.75 ; C43.P@-30.99,-48.46 L9.1@-30.99,-43.05
NetD1_6: D1.6 F2.2 V2.2 | length 7.9
  SIGNAL TOP w0.2: D1.6@-35.4,31.163 -34.95,31.613 V2.2@-34.95,32.9 -34.95,34.1 -33,36.05 F2.2@-33,37.635 ; D1.6@-35.3,30.75 D1.6@-35.3,31.163
NetD1_7: D1.7 F1.2 V2.1 | length 7.7
  SIGNAL TOP w0.2: F1.2@-38.4,37.62 -38.4,35.75 -36.85,34.2 V2.1@-36.85,32.9 -36.9,32.85 -36.9,31.524 -36.57,31.194 D1.7@-36.57,30.75
NetD3_2: D3.2 D4.7 R24.1 | length 17.9
  SIGNAL TOP w0.2: D3.2@24.612,-13 33.3,-13 cw(c33.3,-13.6) 33.9,-13.6 33.9,-17.555 ccw(c33.92,-17.555) D4.7@33.92,-17.575 33.92,-21.72 R24.1@34,-21.8
NetD3_5: D3.5 R27.1 | length 8.6
  SIGNAL TOP w0.3: R27.1@10.88,-9.8 12.05,-9.8 cw(c12.05,-10.46) 12.677,-10.255 ccw(c12.962,-10.16) 12.819,-10.424 12.886,-10.46 12.962,-10.46 D3.5@19.188,-10.46
NetD3_7: D3.7 R23.1 | length 8.7
  SIGNAL TOP w0.3: R23.1@10.98,-14.1 11.685,-14.1 11.777,-14.1 11.853,-14.049 ccw(c11.685,-13.8) 11.978,-13.865 cw(c13.052,-14.1) 13.052,-13 D3.7@19.188,-13
NetD4_1: D4.1 R26.2 | length 2.2
  SIGNAL TOP w0.2: R26.2@36.4,-6.3 cw(c36.4,-6.36) 36.46,-6.36 D4.1@36.46,-8.425
NetD4_4: D4.4 R28.2 | length 2.1
  SIGNAL TOP w0.2: R28.2@28.8,-6.3 cw(c28.8,-6.34) 28.84,-6.34 D4.4@28.84,-8.425
NetD4_6: D4.6 D6.2 R25.1 | length 12.3
  SIGNAL TOP w0.2: D6.2@24.612,-24.035 27.165,-24.035 ccw(c27.165,-22.9) 28.3,-22.9 cw(c29.38,-22.9) 29.38,-21.82 R25.1@31.4,-21.82 31.38,-21.8 D4.6@31.38,-17.575
NetD5_1: D5.1 R29.2 | length 2.4
  SIGNAL TOP w0.2: R29.2@41.6,-6 cw(c41.6,-6.05) 41.65,-6.05 D5.1@41.65,-8.42
NetD6_5: D6.5 R33.1 | length 7.9
  SIGNAL TOP w0.3: R33.1@12.38,-21.1 12.38,-20.935 12.715,-20.6 19.012,-20.6 19.188,-20.776 D6.5@19.188,-21.495
NetD6_7: D6.7 R32.1 | length 12.2
  SIGNAL TOP w0.3: R32.1@10.9,-28.42 10.9,-25.214 cw(c12.069,-25.211) 11.762,-24.084 cw(c12.077,-25.241) 12.018,-24.043 ccw(c12.001,-23.743) 12.071,-24.035 D6.7@19.188,-24.035
NetDA1_4: DA1.4 R1.1 R2.1 R3.2 | length 5
  SIGNAL TOP w0.3: R3.2@25.7,-31.75 DA1.4@25.7,-34.995 27.445,-34.995 R1.1@27.45,-35
NetDD3_2: DD3.2 L3.1 VD6.2 | length 3.4
  SIGNAL TOP w0.4: VD6.2@26.2,32.98 26.215,32.965 29.59,32.965 DD3.2@29.605,32.95
NetDD3_4: DD3.4 R11.1 R12.2 | length 3.5
  SIGNAL TOP w0.4: R11.1@26.1,29.55 DD3.4@29.605,29.55
NetDD4_2: DD4.2 L4.1 VD8.2 | length 3
  SIGNAL TOP w0.4: VD8.2@6.2,32.98 6.215,32.965 9.165,32.965 DD4.2@9.18,32.95
NetDD4_4: DD4.4 R16.1 R20.2 | length 3.5
  SIGNAL TOP w0.4: R16.1@5.7,29.55 R20.2@7,29.55 DD4.4@9.18,29.55
NetR13_2: R13.2 VD4.2 | length 3.3
  SIGNAL TOP w0.4: VD4.2@25.85,9.75 R13.2@25.85,13.1
NetR21_2: R21.2 VD7.2 | length 3.3
  SIGNAL TOP w0.4: VD7.2@22.05,9.8 R21.2@22.05,13.15
NetR22_2: R22.2 VD9.1 | length 2.4
  SIGNAL TOP w0.3: VD9.1@20.93,-17.3 23.22,-17.3 cw(c23.22,-17.4) R22.2@23.32,-17.4
NetR23_2: R23.2 VD10.A VT1.G | length 15.4
  SIGNAL TOP w0.3: VD10.A@4.735,-14.1 R23.2@7.92,-14.1 7.92,-23.68 cw(c7.6,-23.68) 7.6,-24 5.44,-24 VT1.G@5.44,-23.99
NetR27_2: R27.2 VD11.C VT2.G | length 32.1
  SIGNAL TOP w0.2: R27.2@7.81,-9.69 R27.2@7.92,-9.8
  SIGNAL TOP w0.3: VD11.C@-6.8,5.035 -6.8,6.6 -6.6,6.8 -3.976,6.8 -3.8,6.624 -3.8,-2.8 -3.2,-3.4 2.5,-3.4 3,-3.9 3,-6.824 3.176,-7 5.264,-7 5.44,-7.176 VT2.G@5.44,-9.79 R27.2@7.81,-9.79
NetR31_2: R31.2 VD12.1 | length 2.3
  SIGNAL TOP w0.3: VD12.1@20.93,-28.3 R31.2@23.22,-28.3
NetR32_2: R32.2 VD13.A VT3.G | length 10.3
  SIGNAL TOP w0.3: VD13.A@5.385,-36.25 5.44,-36.195 VT3.G@5.44,-31.48 10.8,-31.48 ccw(c10.8,-31.38) R32.2@10.9,-31.38
NetR33_2: R33.2 VD14.C VT4.G | length 36.9
  SIGNAL TOP w0.3: VD14.C@5.385,-48.5 8.5,-48.5 9.43,-47.57 VT4.G@9.43,-44.25 ; VT4.G@9.39,-44.29 cw(c9.43,-44.29) VT4.G@9.43,-44.25 ; v1(9.4,-34) 11.75,-34 cw(c11.75,-35.25) 13,-35.25 13,-43.5 cw(c12.25,-43.5) 12.25,-44.25 VT4.G@9.43,-44.25 ; v1(9.4,-24.3) R33.2@9.4,-21.459
  SIGNAL BOT w0.3: v1(9.4,-34) v1(9.4,-24.3)
NetVD3_A: VD3.A X6.1
P\W\M\_\C\O\N\T\R\O\L\: DD1.41 R28.1 X5.4 | length 63.5
  SIGNAL TOP w0.2: DD1.41@-15.95,17 DD1.41@-15.9,16.912 ; DD1.41@-15.9,16.875 -15.9,9.421 ccw(c-14.439,9.421) -14.439,7.96 X5.4@-0.1,7.96 5.16,7.96 cw(c5.16,5.72) 7.4,5.72 7.4,-3.36 ccw(c10.24,-3.36) 10.24,-6.2 R28.1@27.2,-6.2
PIEZO_OUT_1: L7.2 X8.1 | length 5.5
  SIGNAL TOP w1.5: L7.2@-36.09,6.21 L7.2@-36.05,6.25
  SIGNAL TOP w1.8: X8.1@-41.5,6.21 L7.2@-36.09,6.21
PIEZO_OUT_2: L9.2 X9.1 | length 5.4
  SIGNAL TOP w1.8: X9.1@-41.5,-41.49 L9.2@-36.09,-41.49
POS_SENSOR: DA1.3 VD2.3 X1.2 | length 16.6
  SIGNAL TOP w0.3: DA1.3@25.7,-37.505 25.7,-38.524 25.876,-38.7 VD2.3@28.65,-38.7 ; VD2.3@28.7,-38.75 X1.2@41.29,-38.75
POS_SENSOR_AMP: DA1.1 R1.2 R6.2 | length 9
  SIGNAL TOP w0.3: R6.2@22.3,-37.5 22.305,-37.505 DA1.1@23.8,-37.505 cw(c23.8,-37.455) 23.75,-37.455 23.75,-36.5 cw(c24,-36.5) 24,-36.25 28.5,-36.25 ccw(c28.5,-35.7) 29.05,-35.7 R1.2@29.05,-35
PWM_CONTROL: DD1.42 R26.1 X5.3 | length 70.9
  SIGNAL TOP w0.2: DD1.42@-15.4,16.875 -15.4,11.435 ccw(c-14.465,11.435) -14.465,10.5 X5.3@-0.1,10.5 5.96,10.5 cw(c5.96,8.26) 8.2,8.26 8.2,-2.148 ccw(c10.752,-2.148) 10.752,-4.7 R26.1@36.4,-4.7
pwr_in_filt: C24.2 C25.2 D2.11 L2.2 R10.1 R14.2 | length 13.9
  SIGNAL TOP w0.2: D2.11@3,38.45 3,39 4.15,40.15 R10.1@4.15,46.5 5.9,46.5 cw(c5.9,46) 6.4,46 6.4,43.2 ccw(c6.45,43.2) R14.2@6.45,43.15
PWR_MON_ALERT: D2.3 DD1.91 R17.1 | length 30.1
  SIGNAL TOP w0.2: DD1.91@-18.9,32.325 -18.9,33.183 -18.583,33.5 -3.417,33.5 -3.3,33.383 -3.3,30.9 -2.917,30.517 0.283,30.517 0.4,30.634 R17.1@0.4,31.5 2.383,31.5 2.5,31.617 D2.3@2.5,35.65
PWR_MON_SCL: D2.5 DD1.92 R19.1 | length 25.7
  SIGNAL TOP w0.2: DD1.92@-19.4,32.325 -19.381,32.344 -19.381,33.883 -19.264,34 -1.717,34 -1.6,34.117 -1.6,35 -1.4,35.2 0.283,35.2 0.4,35.083 R19.1@0.4,34.5 1.2,34.5 1.35,34.65 D2.5@1.35,36.3
PWR_MON_SDA: D2.4 DD1.93 R18.1 | length 29.6
  SIGNAL TOP w0.2: DD1.93@-19.9,32.325 -19.9,34.2 -19.4,34.7 v1(-2.35,34.7) ; v1(-2.35,32.25) 0.333,32.25 0.45,32.367 0.45,32.95 R18.1@0.4,33 0.4,33.583 0.517,33.7 1.783,33.7 2,33.917 D2.4@2,35.65
  SIGNAL BOT w0.2: v1(-2.35,32.25) v1(-2.35,34.7)
R\S\T\: D7.9 R36.2 | length 10.1
  SIGNAL TOP w0.2: D7.9@20.105,-43.705 20.983,-43.705 21.1,-43.588 21.1,-39.317 21.217,-39.2 23.683,-39.2 23.8,-39.317 23.8,-41.2 R36.2@23.7,-41.3
RCC_OSC_IN: C4.2 DD1.12 Z1.1 | length 8.1
  SIGNAL TOP w0.15: C4.2@-30.9,26.4 -30.902,26.398 -30.902,25.098 Z1.1@-30.95,25.05 -30.95,24.55 -30.7,24.3 -27.7,24.3 -26.9,25.1 DD1.12@-25.125,25.1
RCC_OSC_OUT: C5.2 DD1.13 Z1.3 | length 6.5
  SIGNAL TOP w0.15: C5.2@-29.9,22.3 -29.897,22.303 -29.897,23.603 Z1.3@-29.85,23.65 -27.65,23.65 -26.7,24.6 DD1.13@-25.125,24.6
STM_BOOT0: DD1.94 R9.2 | length 2.5
  SIGNAL TOP w0.2: R9.2@-21.3,34.5 -21.267,34.467 -21.267,34.067 -20.4,33.2 DD1.94@-20.4,32.325
SWCLK: DD1.76 X4.1 | length 14.4
  SIGNAL TOP w0.2: DD1.76@-11.4,32.325 -4.025,32.325 -3.8,32.1 -3.8,29.4 -3.37,28.97 X4.1@0,28.97
SWDIO: DD1.72 X4.3 | length 14.4
  SIGNAL TOP w0.2: DD1.72@-9.675,29.1 -8.317,29.1 -8.2,28.983 -8.2,24.6 -7.49,23.89 X4.3@0,23.89
USART_RX: D1.1 DD1.24 | length 27.9
  SIGNAL TOP w0.2: D1.1@-37.84,25.25 -37.84,17.44 -35.3,14.9 -24.117,14.9 -24,15.017 -24,18.964 -24.117,19.081 -25.106,19.081 DD1.24@-25.125,19.1
USART_TX: D1.4 DD1.23 | length 24.6
  SIGNAL TOP w0.2: D1.4@-34.03,25.25 -34,25.22 -34,23.367 -34.117,23.25 -35.783,23.25 -35.9,23.133 -35.9,17 -34.8,15.9 -26.8,15.9 -26.328,16.372 -26.328,19.483 -26.211,19.6 DD1.23@-25.125,19.6
VBUS: D7.8 R34.2 R35.1 | length 3.4
  SIGNAL TOP w0.2: D7.8@20.105,-44.205 22.195,-44.205 R34.2@22.2,-44.2 R35.1@22.2,-42.9
VBUS_OUT: R34.1 VD15.4 X10.A4 X10.A9 X10.B4 X10.B9 | length 35.1
  SIGNAL TOP w0.2: VD15.4@12.175,-50.16 12.175,-53.675 12.25,-53.75 19.868,-53.75 ; X10.A4@19.5,-49.96 19.501,-49.961 19.501,-50.501 19.751,-50.751 19.751,-53.633 19.868,-53.75 ; R34.1@23.8,-44.2 27,-44.2 27.425,-44.625 27.425,-48.3 26.975,-48.75 22.677,-48.75 22.501,-48.926 22.501,-50.517 22.252,-50.766 22.252,-51.26 X10.B4@22.25,-51.26 22.251,-53.633 22.134,-53.75 19.868,-53.75
VCAP_1: C9.2 DD1.49 | length 2.3
  SIGNAL TOP w0.3: C9.2@-11.9,14.6 DD1.49@-11.9,16.875
VCAP_2: C8.2 DD1.73 | length 2.6
  SIGNAL TOP w0.3: DD1.73@-9.675,29.6 -7.225,29.6 C8.2@-7.125,29.5
VPP: C46.2 D7.16 | length 1.5
  SIGNAL TOP w0.2: D7.16@17.9,-41.5 C46.2@17.9,-40
pads on no net: D2.6 D2.7 D2.8 D2.14 D2.15 D2.16 D7.1 D7.10 D7.11 D7.12 D7.13 D7.14 D7.15 D7.17 D7.18 D7.19 D7.22 D7.23 D7.24 DD1.3 DD1.4 DD1.5 DD1.7 DD1.8 DD1.9 DD1.15 DD1.16 DD1.17 DD1.18 DD1.26 DD1.29 DD1.30 DD1.32 DD1.33 DD1.34 DD1.35 DD1.36 DD1.37 DD1.38 DD1.39 DD1.40 DD1.44 DD1.45 DD1.46 DD1.51 DD1.52 DD1.53 DD1.54 DD1.55 DD1.56 DD1.57 DD1.58 DD1.59 DD1.60 DD1.61 DD1.62 DD1.63 DD1.64 DD1.65 DD1.66 DD1.67 DD1.68 DD1.69 DD1.77 DD1.78 DD1.79 DD1.80 DD1.81 DD1.82 DD1.83 DD1.84 DD1.85 DD1.86 DD1.87 DD1.88 DD1.89 DD1.90 DD1.95 DD1.96 DD1.97 DD1.98 MH1.1 MH2.1 MH3.1 MH4.1 MH5.1 X10.A2 X10.A3 X10.A8 X10.A10 X10.A11 X10.B2 X10.B3 X10.B8 X10.B10 X10.B11

## Polygon pours and split planes (outlines as drawn)
GND on SIGNAL TOP "GND" (solid, pour order 17): -44.5,57 44.5,57 44.5,-57 -44.5,-57
+150V_FILT on SIGNAL TOP "+150V" (solid, pour order 13): -16.5,-24.5 -16.5,-20.5 -6.5,-20.5 -6.5,-18 2.75,-18 2.75,-34 -30.75,-34 -30.75,-24.5
+150V on SIGNAL TOP "+150V" (solid, pour order 12): -44.5,-23.5 -21.75,-23.5 -21.75,-11 -44.5,-11
+12V on SIGNAL TOP "+12V" (solid, pour order 15): 33,3 33,8.35 35.3,8.35 35.3,17.45 31.1,17.45 31.1,3
+3.3V on SIGNAL TOP "+3.3V" (solid, pour order 7): 12.8,3.7 12.8,8.4 15.1,8.4 15.1,17.5 10.9,17.5 10.9,3.7
NetVD3_A on SIGNAL TOP "pwr_in" (solid, pour order 10): -16.2,55.1 -16.2,46.25 -18.8,46.25 -18.8,55.1
NetC22_2 on SIGNAL TOP "NetC20_2" (solid, pour order 11): -15.1,48.5 -15.1,44.25 -20.75,44.25 -20.75,41 -0.6,41 -0.6,48.5
NetDD3_2 on SIGNAL TOP "pwr_out" (solid, pour order 5): 28.325,33.5 28.325,32.25 31.825,32.25 31.825,22.5 35.325,22.5 35.325,33.5
NetDD4_2 on SIGNAL TOP "pwr_out" (solid, pour order 4): 7.9,33.5 7.9,32.25 11.4,32.25 11.4,22.5 14.9,22.5 14.9,33.5
NetC20_P on SIGNAL TOP "pwr_in_filt" (solid, pour order 3): 38.4,36.3 31.7,36.3 31.7,33.9 28.3,33.9 28.3,38 35.5,38 35.5,44.5 22.4,44.5 22.4,37.5 10.9,37.5 10.9,34 7.9,34 7.9,35.5 9.4,35.5 9.4,39.4 20.15,39.4 20.15,44.5 9.4,44.5 9.4,48.5 38.4,48.5
pwr_in_filt on SIGNAL TOP "pwr_in_filt" (solid, pour order 1): -8.35,54.25 -8.35,49.25 3.15,49.25 3.15,44.5 5.15,44.5 5.15,48.75 8.15,48.75 8.15,51.75 2.15,51.75 2.15,54.25
+3.3V on PWR "+3.3V" (solid, pour order 23): -44.5,57 44.5,57 44.5,-57 -44.5,-57
+12V on PWR "+12V" (solid, pour order 20): 44.5,-32.496 32.1,-32.4 32.1,-38.1 20.1,-38.1 20.1,7 20.7,7 44.5,7
GND on GND "GND" (solid, pour order 22): -44.5,57 44.5,57 44.5,-57 -44.5,-57
GND on SIGNAL BOT "GND" (solid, remove dead copper, pour order 24): -44.5,57 44.5,57 44.5,-57 -44.5,-57

## Other copper
SIGNAL TOP:
  pour cut-out: 31.99,-32.51 44.99,-32.51 44.99,-46.51 31.99,-46.51
GND:
  pour cut-out: 32,-32.5 45,-32.5 45,-46.5 32,-46.5
PWR:
  pour cut-out: 32,-32.5 45,-32.5 45,-46.5 32,-46.5
SIGNAL BOT:
  pour cut-out: 32,-32.5 45,-32.5 45,-46.5 32,-46.5

## Silkscreen, mask and mechanical layers (free items; w line width, h text height)
Top Overlay:
  lines w0.15: 1.75,8.75 4.5,8.75
  lines w0.254: 1.8,13.9 3.6,13.9
  text "GND" at -12.8,55.1 h1
  text "+" at -20,53.333 h1
  text "МФАС." at 15.4,53.229 h2.5
  text "S/N" at 15.4,49.629 h2.5
  text "B" at -37.3,48.95 h1
  text "A" at -34.8,48.95 h1
  text "GND" at -33.3,48.95 h1
  text "N" at -28.853,48.95 h1
  text "P" at -26.313,48.95 h1
  text "GND" at -24.853,48.95 h1
  text "CLK" at 1.95,28.7 h1
  text "GND" at 1.95,26.16 h1
  text "DIO" at 1.95,23.62 h1
  text "RST" at 1.95,21.08 h1
  text "3.3V" at 1.95,18.54 h1
  text "3.3V" at 1.85,15.31 h1
  text "EN" at 1.85,12.56 h1
  text "GND" at -42.35,10.85 h0.6
  text "PWM" at 1.85,10.02 h1
  text "PWM" at 1.85,7.48 h1
  text "12V" at 28.3,7.45 h1 r90
  text "3.3V" at 20.55,7.2 h1 r90
  text "GND" at 1.85,4.94 h1
  text "PIEZO_OUT" at -43.85,3.7 h0.6
  text "rev.A" at 22.7,-0.678 h4
  text "Y2026N1" at 8.3,-0.7 h4
  text "Лабаратория Высокоточных" at 8.683,-2.77 h2
  text "Систем Ориентации" at 8.733,-5.07 h2
  text "150V" at -35.8,-21.72 h1
  text "GND" at -35.8,-26.8 h1
  text "12V" at 35.3,-36.7 h1
  text "GND" at -42.35,-36.85 h0.6
  text "IN" at 35.8,-39.3 h1
  text "GND" at 35.2,-41.8 h1
  text "PIEZO_OUT" at -43.85,-44 h0.6
  text "CONSOLE" at 5.5,-56.5 h1.5
Mechanical 1:
  the board outline again, w0.15